# Altium PCB UKU205w.PcbDoc (part 3 of 3)
Units mm, origin at the board's own origin, x right, y up, seen from the top; angles counter-clockwise.
Board outline 374.65 x 264.35 mm, 2 copper layers (Top Layer, Bottom Layer); 276 components, 443 nets, 1000 pads, 796 vias.
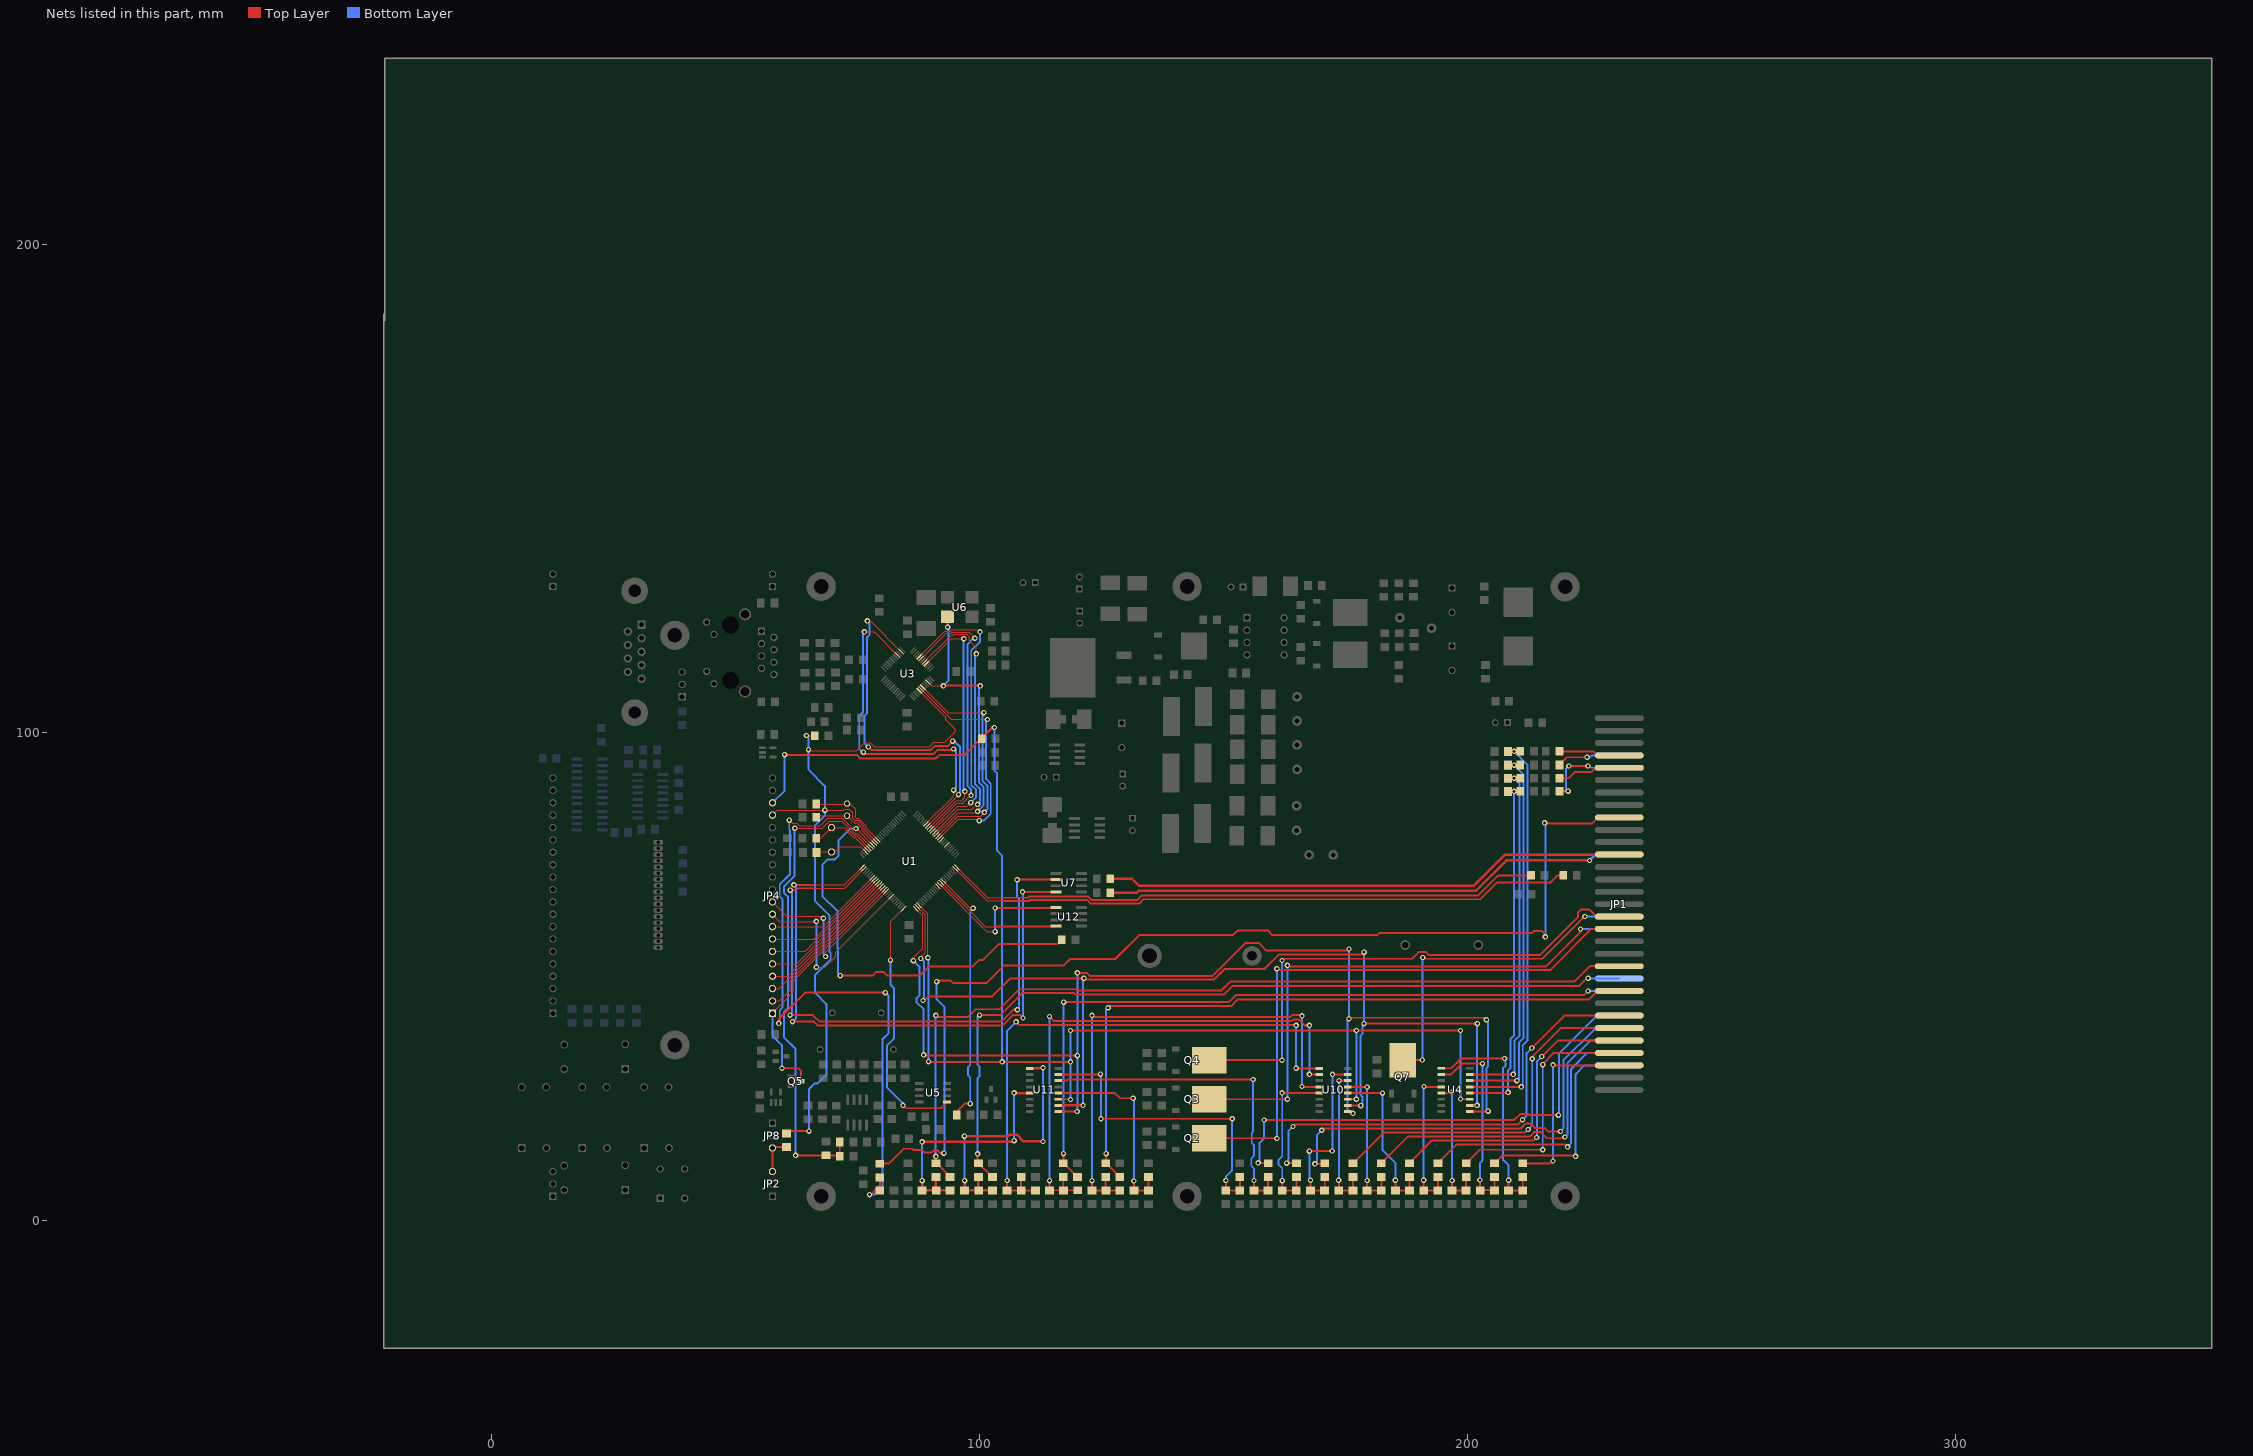
[diagram p3: the nets of this part, all layers, seen from the top]

## Via types
v1: diameter 1.1, hole 0.6, Top Layer to Bottom Layer, 795 vias
v2: diameter 3, hole 2, Top Layer to Bottom Layer, 1 vias

## Nets (pads, with @x,y where several pads share a name; then routed paths per layer and width w, separated by ;. In a path a pad name is that pad's centre, name@x,y a point inside that pad or via, vN(x,y) a via of type N, cw(c..) or ccw(c..) an arc to the next point about the centre after c; other vN are vias at no path point) (continued)
P1_1: U1.94 U3.4 | length 71.5
  Top Layer w0.25: v1(76.35,120.65) 78.366,120.65 U3.4@83.119,115.898 ; U1.94@88.959,81.287 94.65,86.978 v1(94.65,88.2)
  Top Layer w0.4: v1(76.15,96) 76.5,95.65 90.55,95.65 91.3,96.4 94.35,96.4 v1@94.65,96.7
  Bottom Layer w0.4: v1(76.15,96) 75.95,96 75.3,96.65 75.3,103.4 76.05,104.15 76.05,120.35 v1(76.35,120.65) ; v1(94.65,88.2) 95.15,88.7 95.15,96.15 v1(94.65,96.65)
P1_4: U1.93 U3.2 | length 75.5
  Top Layer w0.25: v1(76.95,122.9) 77.531,122.9 U3.2@83.826,116.605 ; U1.93@89.312,80.898 95.65,87.236 v1(95.65,87.3)
  Top Layer w0.4: v1(77.15,97.05) 77.75,96.45 90,96.45 90.85,97.3 93.5,97.3 v1(94.45,98.25)
  Bottom Layer w0.4: v1(76.95,122.9) 77.35,122.5 77.35,120 76.85,119.5 76.85,103.9 76.35,103.4 76.35,97.85 v1(77.15,97.05) ; v1(94.45,98.25) 94.8,98.25 95.95,97.1 95.95,87.6 v1(95.65,87.3)
P1_8: U1.92 U3.40 | length 52.3
  Top Layer w0.25: U3.40@89.023,114.13 94.143,119.25 v1(96.75,119.25) ; U1.92@89.666,80.544 95.172,86.05 96.25,86.05 96.95,86.75 v1(96.95,87.95)
  Bottom Layer w0.4: v1(96.75,119.25) 96.7,119.2 96.7,88.2 v1(96.95,87.95)
P1_9: U1.91 U3.43 | length 58.1
  Top Layer w0.25: U3.43@87.963,115.19 93.122,120.35 94.116,120.35 94.316,120.55 97.8,120.55 v1(99,119.35) ; U1.91@90.019,80.191 95.329,85.5 96.55,85.5 v1(98.2,87.15)
  Bottom Layer w0.4: v1(98.2,87.15) 98.2,88.35 97.5,89.05 97.5,118.15 98.7,119.35 v1(99,119.35)
P1_10: U1.90 U3.44 | length 61.7
  Top Layer w0.25: U3.44@87.609,115.544 92.815,120.75 93.95,120.75 94.3,121.1 99.6,121.1 v1(100.05,120.65) ; U1.90@90.373,79.837 95.436,84.9 97.4,84.9 v1(98.15,85.65)
  Bottom Layer w0.4: v1(98.15,85.65) 99.25,86.75 99.25,88.25 98.25,89.25 98.25,116.85 100.05,118.65 v1(100.05,120.65)
P1_14: U1.89 U3.41 | length 58.6
  Top Layer w0.25: U3.41@88.67,114.483 94.036,119.85 94.35,119.85 94.65,120.15 97.3,120.15 97.85,119.6 97.85,118.85 99.3,117.4 v1(99.3,116.15) ; U1.89@90.727,79.484 95.543,84.3 98.35,84.3 99.35,85.3 v1(99.55,85.3)
  Bottom Layer w0.4: v1(99.3,116.15) 99.05,115.9 99.05,89.4 100.05,88.4 100.05,85.8 v1(99.55,85.3)
P1_15: U1.88 U3.34 U6.3 | length 62.6
  Top Layer w0.25: U3.34@89.377,110.347 90.123,109.6 v1(92.55,109.6) ; U1.88@91.08,79.13 95.55,83.6 99.3,83.6 v1(99.55,83.85)
  Top Layer w0.4: v1@92.581,109.631 v1@100.031,109.631 ; v1(93.4,121.6) U6.3@93.4,123.65
  Bottom Layer w0.4: v1(92.55,109.6) 93.55,110.6 v1@93.55,121.6 ; v1(99.55,83.85) 100.8,85.1 100.8,88.8 99.8,89.8 99.8,109.3 v1(100.1,109.6)
P1_16: U1.87 U3.31 | length 47.5
  Top Layer w0.25: U3.31@88.316,109.286 93.502,104.1 v1(100.85,104.1) ; U1.87@91.434,78.776 95.507,82.85 100.2,82.85 100.95,83.6 v1(100.95,83.65)
  Bottom Layer w0.4: v1(100.85,104.1) 100.55,103.8 100.55,90.15 101.55,89.15 101.55,84.25 v1(100.95,83.65)
P1_17: U1.86 U3.30 | length 48.8
  Top Layer w0.25: U3.30@87.963,108.933 94.195,102.7 v1(101.55,102.7) ; U1.86@91.787,78.423 95.614,82.25 99.6,82.25 v1(99.9,81.95)
  Bottom Layer w0.4: v1(99.9,81.95) 100.85,81.95 102.25,83.35 102.25,89.55 101.3,90.5 101.3,102.45 v1(101.55,102.7)
P1_18: JP4.8 U1.32 | length 24.7
  Top Layer w0.25: JP4.8@57.5,60.23 67.937,60.23 U1.32@77.999,70.291
P1_19: JP4.7 U1.33 | length 25.9
  Top Layer w0.25: JP4.7@57.5,57.69 66.104,57.69 U1.33@78.352,69.938
P1_20: JP4.6 U1.34 | length 27.2
  Top Layer w0.25: JP4.6@57.5,55.15 64.272,55.15 U1.34@78.706,69.584
P1_21: JP4.5 U1.35 | length 28.4
  Top Layer w0.25: JP4.5@57.5,52.61 62.439,52.61 U1.35@79.059,69.231
P1_22: JP4.4 U1.36 | length 29.7
  Top Layer w0.25: JP4.4@57.5,50.07 60.606,50.07 U1.36@79.413,68.877
P1_23: JP4.3 U1.37 | length 31
  Top Layer w0.25: JP4.3@57.5,47.53 58.773,47.53 U1.37@79.766,68.523
P1_24: JP4.2 U1.38 | length 33.3
  Top Layer w0.25: JP4.2@57.5,44.99 58.89,44.99 61.1,47.2 61.1,49.15 U1.38@80.1,68.15
P1_25: JP4.1 Q5.3 U1.39 | length 53.2
  Top Layer w0.25: JP4.1@57.5,42.45 61.8,46.75 61.8,49.143 U1.39@80.473,67.816
  Top Layer w0.4: v1(59.45,31.2) 62.8,31.2 63.395,30.605 Q5.3@63.395,28.544
  Bottom Layer w0.4: JP4.1@57.5,42.45 57.5,37.9 59.45,35.95 v1(59.45,31.2)
P1_26: JP4.10 U1.40 | length 38.4
  Top Layer w0.25: JP4.10@57.5,65.31 60.41,62.4 67.5,62.4 v1(67.95,61.95) ; v1(68.4,54.1) 68.4,55 80.827,67.427 U1.40@80.827,67.463
  Bottom Layer w0.4: v1(67.95,61.95) 67.95,54.55 v1(68.4,54.1)
P1_27: JP4.9 U1.43 | length 41.1
  Top Layer w0.25: JP4.9@57.5,62.77 59.02,61.25 66.55,61.25 v1(66.5,61.3) ; v1(66.5,51.9) 68.25,51.9 70.45,54.1 70.45,54.964 U1.43@81.888,66.402
  Bottom Layer w0.4: v1(66.5,51.9) v1(66.5,61.3)
P1_30: C25.2 R66.2 R67.1 U1.21 | length 99.7
  Top Layer w0.25: v1(62.1,80.4) 67.7,80.4 69.15,81.85 71.743,81.85 73,80.593 73,80.184 74.334,78.85 74.743,78.85 U1.21@77.243,76.35
  Top Layer w0.4: v1(62.25,13.35) 62.3,13.35 62.312,13.362 71.238,13.362 71.3,13.425 R66.2@71.3,16.15
  Bottom Layer w0.4: v1(62.1,80.4) 62.05,80.4 62.05,70.65 59.85,68.45 59.85,67.2 60.65,66.4 60.65,43.5 59.9,42.75 59.9,37.5 62.25,35.15 v1(62.25,13.35)
P1_31: R16.1 R25.1 U1.20 | length 137.1
  Top Layer w0.25: v1(60.95,82.05) 61.55,81.45 62.45,81.45 63,80.9 67.35,80.9 68.85,82.4 71.95,82.4 71.95,82.35 73.073,81.228 73.4,80.9 73.4,80.35 74.5,79.25 75.05,79.25 75.195,79.105 U1.20@77.645,76.655
  Top Layer w0.4: v1(58.8,40.4) 58.8,41.3 64.2,46.7 v1(80.65,46.7) ; v1(77.4,5.3) 77.607,5.3 78.981,6.675 79.507,7.2 R25.1@79.507,8.838
  Bottom Layer w0.4: v1(58.8,40.4) 59,40.6 59,43.1 59.6,43.7 59.6,65.8 59,66.4 59,68.9 61.1,71 61.1,79.9 60.95,80.05 v1(60.95,82.05) ; v1(77.4,5.3) 78.4,5.3 80.1,7 80.1,37.2 81.3,38.4 81.3,46.05 v1(80.65,46.7)
P2_0: R54.1 U1.75 | length 122.8
  Top Layer w0.25: U1.75@95.323,72.413 101.585,66.15 104.6,66.15
  Top Layer w0.4: 104.6,66.15 109.8,66.15 110.05,66.4 122.25,66.4 123,65.65 132.25,65.65 133.25,66.65 202.15,66.65 206.243,70.743 R54.1@212.988,70.743
P2_1: R55.1 U1.74 | length 130.1
  Top Layer w0.25: U1.74@94.969,72.059 101.528,65.5 104.6,65.5
  Top Layer w0.4: 104.6,65.5 110.15,65.5 110.35,65.7 122,65.7 122.75,64.95 132.65,64.95 133.55,65.85 202.6,65.85 206.05,69.3 217.05,69.3 218.493,70.743 R55.1@219.588,70.743
P2_6: R34.1 U1.67 | length 53.2
  Top Layer w0.25: U1.67@92.494,69.584 98.078,64 v1(98.65,64)
  Top Layer w0.4: R34.1@95.288,21.643 95.288,22.288 96.95,23.95 v1(98.05,23.95)
  Bottom Layer w0.4: v1(98.05,23.95) 98.05,29.3 97.6,29.75 97.6,31.45 98.05,31.9 98.05,63.4 v1(98.65,64)
P2_7: U1.66 U12.4 | length 27.1
  Top Layer w0.25: U1.66@92.15,69.25 92.155,69.245 97.95,63.45 101.158,60.242 103.058,60.242
  Top Layer w0.4: 103.05,60.25 103.058,60.242 U12.4@115.539,60.242
P2_8: U1.65 U12.1 | length 32.6
  Top Layer w0.25: U1.65@91.773,68.877 U1.65@91.787,68.877 101.464,59.2 v1(103.15,59.2)
  Top Layer w0.4: v1(103.152,64.052) U12.1@115.539,64.052
  Bottom Layer w0.4: v1(103.15,59.2) 103.15,64.05 v1(103.152,64.052)
P2_9: U1.64
P2_10: JP4.18 R82.2 U1.53 U4.11 U10.11 U11.11 | length 316.5
  Top Layer w0.25: U1.53@87.545,64.634 89.35,62.829 v1(89.35,53.85)
  Top Layer w0.4: v1(60,95.5) 60.05,95.45 74.75,95.45 75.5,94.7 91,94.7 91.75,95.45 96.95,95.45 102.55,101.05 v1(103,101.05) ; v1(89.5,32.55) 89.55,32.5 v1(118.6,32.5) ; U11.11@116.125,24.845 v1@118.555,24.845 ; v1(118.6,38.95) v1(198.55,38.95) ; U10.11@175.425,24.845 177.195,24.845 v1(177.2,24.85) ; v1(198.55,24.9) 198.598,24.852 U4.11@200.42,24.852
  Bottom Layer w0.4: JP4.18@57.5,85.65 JP4.18@57.5,85.63 60,88.13 v1(60,95.5) ; v1(89.35,53.85) 89.5,53.7 v1(89.5,32.55) ; v1(103,101.05) 103,92.2 103.55,91.65 103.55,75.8 104.6,74.75 v1(104.6,32.5) ; v1(118.6,24.8) v1(118.6,38.95) ; v1(177.2,24.85) v1(177.2,38.95) ; v1(198.55,24.9) v1(198.55,38.95)
P2_11: U1.52 U4.10 U10.10 U11.10 | length 223.2
  Top Layer w0.25: U1.52@87.191,64.281 88.8,62.672 88.8,54.9 87.9,54 v1(87.9,53.7)
  Top Layer w0.4: v1@88.4,44.85 89.5,45.95 102.55,45.95 106.2,49.6 121,49.6 121.25,49.35 148,49.35 150.2,51.55 158.35,51.55 161.35,54.55 178.35,54.55 v1(178.8,55) ; U10.10@175.45,23.6 175.5,23.55 v1(178.1,23.55) ; v1(178.75,40.35) v1(202,40.35) ; U4.10@200.42,23.582 201.932,23.582 v1(201.95,23.6)
  Top Layer w0.5: U11.10@116.125,23.575 121.125,23.575 v1(121.15,23.6)
  Bottom Layer w0.4: v1(87.9,53.7) 88.6,53 88.6,45.05 v1@88.4,44.85 ; v1(121.15,23.6) 121.15,49.45 v1(121.35,49.65) ; v1(178.1,23.55) 178.45,23.9 178.45,25.4 178,25.85 178,37.8 178.45,38.25 178.45,40.05 v1(178.75,40.35) ; v1@178.734,40.334 178.734,54.934 v1(178.8,55) ; v1(201.95,23.6) 201.95,40.3 v1(202,40.35)
  other v1: 88.35,45.1
P2_12: U1.51 U4.9 U10.9 U11.9 | length 243.4
  Top Layer w0.25: v1(86.4,53.25) 86.4,53.9 88.3,55.8 88.3,62.465 U1.51@86.837,63.927
  Top Layer w0.4: v1(88.5,33.95) 88.65,33.8 v1(120,33.8) ; U11.9@116.05,22.3 119.9,22.3 v1(119.95,22.35) ; v1(120,50.75) 121.95,50.75 122.6,50.1 147.7,50.1 154.5,56.9 157.15,56.9 158.75,55.3 175.35,55.3 v1(175.7,55.65) ; U10.9@175.425,22.305 176.145,22.305 v1(176.5,21.95) ; v1(175.7,41.35) 175.9,41.55 203.45,41.55 v1(203.85,41.15) ; U4.9@200.42,22.312 204.112,22.312 v1(204.2,22.4)
  Bottom Layer w0.4: v1(86.4,53.25) 87.6,52.05 87.6,46.1 87,45.5 87,44.75 88.5,43.25 v1(88.5,33.95) ; v1(119.95,22.35) 120,22.4 v1(120,50.75) ; v1(175.7,55.65) v1(175.7,41.35) 175.35,41 175.35,22.65 176.05,21.95 v1(176.5,21.95) ; v1(203.85,41.15) 204.2,40.8 204.2,31.6 203.85,31.25 203.85,22.75 v1(204.2,22.4)
P2_13: U1.50 U5.1 | length 53.5
  Top Layer w0.25: v1(81.7,53.35) 81.75,53.4 81.75,61.315 U1.50@84.363,63.927
  Top Layer w0.4: v1(84.25,23.6) 84.85,23 92.006,23 U5.1@93.296,24.29
  Bottom Layer w0.4: v1(81.7,53.35) 81.7,48.35 82.4,47.65 82.4,37.25 80.95,35.8 80.95,27.3 84.25,24 v1(84.25,23.6)
P3_25: U1.27 U7.2 | length 125.9
  Top Layer w0.25: 65.75,68.1 72.272,68.1 U1.27@76.231,72.059
  Top Layer w0.4: v1(61.1,42.1) 65.8,42.1 67.15,40.75 104.4,40.75 106.85,43.2 v1(107.7,43.2) ; v1(61.15,67.7) 62.4,67.7 62.8,68.1 65.75,68.1 ; v1(107.65,69.85) 107.682,69.882 U7.2@115.639,69.882
  Bottom Layer w0.4: v1(61.1,42.1) 61.5,42.5 61.5,67.35 v1(61.15,67.7) ; v1(107.65,69.85) 107.65,66.25 108.05,65.85 108.05,43.55 v1(107.7,43.2)
P3_26: U1.26 U7.4 | length 125.5
  Top Layer w0.25: 65.8,68.8 72.265,68.8 U1.26@75.877,72.413
  Top Layer w0.4: v1(61.6,40.75) 66,40.75 66.75,40 104.7,40 106.85,42.15 108.2,42.15 v1(108.85,41.5) ; v1(61.9,68.8) 65.8,68.8 ; v1(108.75,67.35) 108.758,67.342 U7.4@115.639,67.342
  Bottom Layer w0.4: v1(61.6,40.75) 62.35,41.5 62.35,68.35 v1(61.9,68.8) ; v1(108.75,67.35) 108.85,67.25 v1(108.85,41.5)
P4_28: U1.82
P4_29: U1.85
PROG_RESET: 
PROG_SET: 
PWM1: JP1.23 R40.1 | length 107.5
  Top Layer w0.5: R40.1@126.762,70.057 131.193,70.057 132.6,68.65 201.3,68.65 207.65,75 JP1.23@231,75
PWM2: JP1.24 R41.1 | length 107.6
  Top Layer w0.5: R41.1@126.762,67.157 132.107,67.157 132.55,67.6 201.75,67.6 207.95,73.8 v1(225,73.8)
  Bottom Layer w0.5: v1(225,73.8) 226.225,75.025 JP1.24@231.089,75.025
R1: JP1.35 Q2.4 | length 122.6
  Top Layer w0.4: Q2.4@147.021,16.853 147.024,16.85 160.9,16.85 160.95,16.8 v1(160.9,16.8) ; v1(160.9,51.6) 161.2,51.3 216.9,51.3 225.375,59.775 JP1.35@231.089,59.775
  Bottom Layer w0.4: v1(160.9,16.8) v1(160.9,51.6)
R2: JP1.36 Q3.4 | length 115.1
  Top Layer w0.4: Q3.4@147.021,24.853 155.097,24.853 155.1,24.85 v1(163.05,24.85) ; v1(163.05,52.3) 163.25,52.1 216.1,52.1 223.15,59.15 v1(223.15,59.75)
  Bottom Layer w0.4: v1(163.05,24.85) v1(163.05,52.3) ; v1(223.15,59.75) 223.175,59.775 JP1.36@231.089,59.775
R3: JP1.33 Q4.4 | length 110.3
  Top Layer w0.4: Q4.4@147.021,32.853 154.047,32.853 154.05,32.85 v1(161.95,32.85) ; v1(161.95,53.3) 162.3,53.65 188.6,53.65 189.95,55 191.45,55 192,54.45 214.85,54.45 222.65,62.25 222.65,63.15 223.2,63.7 225,63.7 226.35,62.35 JP1.33@231.05,62.35
  Bottom Layer w0.4: v1(161.95,32.85) v1(161.95,53.3)
R4: JP1.34 Q7.4 | length 69.4
  Top Layer w0.4: Q7.4@186.697,32.871 190.671,32.871 v1(190.7,32.9) ; v1(190.8,53.9) 191.05,53.65 215.3,53.65 223.95,62.3 v1(224.05,62.3)
  Bottom Layer w0.4: v1(190.7,32.9) 190.45,32.9 190.8,33.25 v1(190.8,53.9) ; v1(224.05,62.3) 224.075,62.275 JP1.34@231.089,62.275
RES: D2.1 JP4.17 R81.1 U1.17 U3.29 | length 164.2
  Top Layer w0.25: JP4.17@57.5,83.09 58.46,84.05 61.75,84.05 61.8,84.1 69.05,84.1 69.1,84.05 ; v1(64.9,96.5) 64.9,96.45 65.1,96.25 74.75,96.25 76.45,97.95 77.6,97.95 78.4,97.15 89.7,97.15 90.55,98 92.85,98 95,100.15 95,100.65 93.05,102.6 93.05,103.138 U3.29@87.609,108.579 ; 69.05,84.05 72.1,84.05 72.3,84.25 73.25,84.25 73.95,83.55 73.95,82.472 74.413,82.008 74.942,82.008 76.35,80.6 76.35,80.072 U1.17@78.706,77.716
  Top Layer w0.4: D2.1@60.15,18.3 v1(65,18.3) ; v1@64.943,99.343 R81.1@66.188,99.343
  Bottom Layer w0.4: v1@64.9,99.3 64.9,92.4 68.25,89.05 68.25,83 66.25,81 66.25,65.45 69.2,62.5 69.2,55 69.45,54.75 69.45,53.55 66.25,50.35 66.25,46.65 68.55,44.35 68.55,29.9 66.75,28.1 66.15,28.1 65,26.95 v1(65,18.3)
  other v1: 68.25,84.1 64.45,99.4
RES_BUT: D2.2 JP2.3 JP8.3 | length 7.8
  Top Layer w0.4: JP2.3@57.5,10.03 JP8.3@57.5,14.87 57.675,15.045 D2.2@60.409,15.045
RTCX1: C40.2 U1.16 Y2.1 | length 16.9
  Top Layer w0.25: C40.2@66.55,85.35 72.803,85.35 Y2.1@72.901,85.449 ; Y2.1@72.805,85.449 73.401,85.449 74.538,84.312 74.538,82.591 74.72,82.408 75.107,82.408 76.75,80.766 76.75,80.379 U1.16@79.059,78.069
RTCX2: C41.2 U1.18 Y2.2 | length 14.5
  Top Layer w0.25: C41.2@66.55,82.85 66.649,82.949 Y2.2@72.805,82.949 73.908,81.845 73.908,81.842 74.25,81.5 74.75,81.5 75.867,80.383 75.867,79.886 78.352,77.401 U1.18@78.352,77.362
RX0: 
SK1: JP1.7 R92.1 | length 12.5
  Top Layer w0.4: R92.1@218.809,96.164 225.736,96.164 226.55,95.35 JP1.7@230.95,95.35
SK2: JP1.8 R94.1 | length 13.1
  Top Layer w0.4: R94.1@218.8,93.4 220.35,94.95 225.1,94.95
  Bottom Layer w0.4: 225.1,94.95 225.475,95.325 JP1.8@231.089,95.325
  other v1: 224.5,94.95
SK3: JP1.9 R96.1 | length 13.2
  Top Layer w0.4: R96.1@218.809,90.664 220.714,90.664 221.95,91.9 225.35,91.9 226.25,92.8 JP1.9@231.089,92.8
SK4: JP1.10 R98.1 | length 17.3
  Top Layer w0.4: R98.1@218.8,88 220.05,88 v1@220.1,87.95 ; v1(220.75,93.15) v1@225,93.15
  Bottom Layer w0.4: v1@220.1,87.95 220.05,87.95 220.075,87.975 220.15,88.05 220.15,92.55 v1(220.75,93.15) ; v1@225,93.15 225.35,92.8 JP1.10@231.089,92.8
  other v1: 220.6,88 224.65,93.15
T1: JP1.45 R8.2 R17.1 | length 142.2
  Top Layer w0.4: v1@125.9,13.35 125.9,11.7 R17.1@128.65,8.95 ; v1(126.3,43.6) 126.65,43.95 151.55,43.95 152.9,45.3 224.9,45.3 226.65,47.05 JP1.45@231.089,47.05
  Bottom Layer w0.4: v1@125.9,13.35 125.9,43.2 v1(126.3,43.6)
  other v1: 125.9,13.7
T2: JP1.46 R9.2 R18.1 | length 152.1
  Top Layer w0.4: v1@117.15,13.5 117.15,11.6 117.3,11.6 R18.1@120.05,8.85 ; v1(117.2,44.75) 117.25,44.8 151.1,44.8 152.5,46.2 223.85,46.2 v1(224.7,47.05)
  Bottom Layer w0.4: v1@117.15,13.5 117.15,44.7 v1(117.2,44.75) ; v1(224.7,47.05) JP1.46@231.089,47.05
  other v1: 117.15,13.7
T3: JP1.43 R11.2 R19.1 | length 161.4
  Top Layer w0.4: R11.2@108.45,11.75 108.55,11.75 R19.1@111.4,8.9 ; R11.2@108.514,11.741 108.514,13.414 v1@108.55,13.45 ; v1(110,45.4) 110.4,45.8 119.1,45.8 119.35,45.55 150.65,45.55 152.2,47.1 223.05,47.1 224.2,48.25 225.3,48.25 226.65,49.6 JP1.43@231.089,49.6
  Bottom Layer w0.4: v1@108.55,13.45 108.55,38.7 110,40.15 v1(110,45.4)
  other v1: 108.55,13.65
T3: 
T3: 
T3: 
T4: JP1.44 R115.1 R119.2 | length 169.6
  Top Layer w0.4: v1@99.55,13.35 99.55,11.85 99.65,11.75 99.687,11.713 R119.2@99.75,11.65 ; R119.2@99.714,11.741 102.514,8.941 R115.1@102.614,8.941 ; v1(99.95,42.1) 104.2,42.1 108.7,46.6 119.35,46.6 119.65,46.3 150.05,46.3 151.85,48.1 222.9,48.1 224.45,49.65 v1(224.7,49.65)
  Bottom Layer w0.4: v1@99.55,13.35 99.55,29.2 99.9,29.55 99.9,31.6 99.55,31.95 99.55,41.7 v1(99.95,42.1) ; v1(224.7,49.65) 224.75,49.6 JP1.44@231.089,49.6
  other v1: 99.55,13.65
T5: JP1.41 R116.1 R120.2 | length 179.3
  Top Layer w0.4: v1@90.9,13.4 90.95,13.35 90.95,11.7 91.156,11.7 R116.1@93.914,8.941 ; v1(91,42.05) 91.35,41.7 97.55,41.7 99.15,43.3 104,43.3 108.1,47.4 119.75,47.4 120,47.15 149.55,47.15 151.35,48.95 221.85,48.95 225.025,52.125 JP1.41@231.089,52.125
  Bottom Layer w0.4: v1@90.9,13.4 90.9,41.95 v1(91,42.05)
  other v1: 91,13.15
TD1: 
TX0: 
TX0: 
TX0: 
TX0: 
TX0: 
TX0: 
TX0: 
TX0: 
TX0: 
TX0: 
TX0: 
TX0: 
TX0: 
TX0: 
TX0: 
TX0: 
TX0: 
TX0: 
TX0: 
TX0: 
TX0: 
TX0: 
TX0: 
TX0: 
TX0: 
TX0: 
TX0: 
TX0: 
TX0: 
TX0: 
TX0: 
TX0: 
TX0: 
TX0: 
TX0: 
TX0: 
TX0: 
TX0: 
TX0: 
TX0: 
TX0: 
TX0: 
TX0: 
TX0: 
TX0: 
TX0: 
TX0: 
TX0: 
TX0: 
TX0: 
TX0: 
TX0: 
TX0: 
TX0: 
TX0: 
TX0: 
TX0: 
TX0: 
TX0: 
TX0: 
TX0: 
TX0: 
TX0: 
TX0: 
TX0: 
TX0: 
TX0: 
TX0: 
TX0: 
TX0: 
TX0: 
TX0: 
TX0: 
TX0: 
TX0: 
TX0: 
TX0: 
TX0: 
TX0: 
TX0: 
TX0: 
TX0: 
TX0: 
TX0: 
TX0: 
TX0: 
TX0: 
TX0: 
TX0: 
TX0: 
TX0: 
U1: JP1.57 R20.2 | length 39.8
  Top Layer w0.4: R20.2@211.25,11.65 216.95,11.65 v1(217.5,12.2) ; v1(217.5,31.9) 217.6,31.8 JP1.57@231.089,31.8
  Bottom Layer w0.4: v1(217.5,12.2) v1(217.5,31.9)
U2: 
U2: 
U2: 
U2: 
U2: 
U2: 
U2: 
U2: 
U2: 
U2: JP1.58 R21.2 | length 43.9
  Top Layer w0.4: R21.2@205.507,11.738 207.069,13.3 222,13.3 v1(222.15,13.15)
  Bottom Layer w0.4: v1(222.15,13.15) 222.15,30 223.95,31.8 JP1.58@231.089,31.8
U3: JP1.55 R22.2 | length 51
  Top Layer w0.4: R22.2@199.707,11.738 202.469,14.5 v1(215.4,14.5) ; v1(215.4,31.95) 215.4,32.05 217.7,34.35 JP1.55@231.089,34.35
  Bottom Layer w0.4: v1(215.4,14.5) v1(215.4,31.95)
U4: JP1.56 R83.2 | length 55.9
  Top Layer w0.4: R83.2@193.9,11.75 197.7,15.55 220.05,15.55 v1(220.5,15.1)
  Bottom Layer w0.4: v1(220.5,15.1) 221.2,15.8 221.2,31.05 224.5,34.35 JP1.56@231.089,34.35
U5: JP1.53 R84.2 | length 62.5
  Top Layer w0.4: R84.2@188.1,11.8 192.7,16.4 213.55,16.4 v1(214.15,17) ; v1(215.2,33.6) 218.475,36.875 JP1.53@231.089,36.875
  Bottom Layer w0.4: v1(214.15,17) 214.25,17.1 214.25,32.65 v1(215.2,33.6)
U6: JP1.54 R85.2 | length 68.8
  Top Layer w0.4: R85.2@182.314,11.741 187.773,17.2 212.75,17.2 213.65,18.1 214.95,18.1 216.2,16.85 219.7,16.85 v1(219.95,17.1)
  Bottom Layer w0.4: v1(219.95,17.1) 220.45,17.6 220.45,32.2 225.125,36.875 JP1.54@231.089,36.875
U7: JP1.51 R86.2 | length 74.3
  Top Layer w0.4: R86.2@176.514,11.741 182.773,18 211.75,18 v1(212.4,18.65) ; v1(213.25,33.15) 213.25,33.6 219.075,39.425 JP1.51@231.089,39.425
  Bottom Layer w0.4: v1(212.4,18.65) 213.25,19.5 v1(213.25,33.15)
U8: JP1.52 R87.2 | length 88.1
  Top Layer w0.4: v1@169.15,11.6 170.573,11.6 R87.2@170.714,11.741 ; v1(170.1,18.5) 170.1,18.6 170.35,18.85 210.9,18.85 211.95,19.9 212.85,19.9 213.75,19 215.7,19 216.45,18.25 v1(219,18.25)
  Bottom Layer w0.4: v1@169.15,11.6 169.15,17.55 v1(170.1,18.5) ; v1(219,18.25) 219.65,18.9 219.65,32.8 226.275,39.425 JP1.52@231.089,39.425
  other v1: 168.7,11.6
U9: JP1.49 R88.2 | length 93.4
  Top Layer w0.4: v1@163.25,11.75 163.259,11.741 R88.2@164.914,11.741 ; v1(164.2,19.25) 164.6,19.65 210.25,19.65 v1(211.25,20.65) ; v1(213.15,35.35) 219.8,42 JP1.49@231.089,42
  Bottom Layer w0.4: v1@163.25,11.75 163.25,18.3 v1(164.2,19.25) ; v1(211.25,20.65) 212.1,21.5 212.1,34.3 v1(213.15,35.35)
  other v1: 162.9,11.75
U10: JP1.50 R91.2 | length 100.3
  Top Layer w0.4: v1@157.35,11.8 157.409,11.741 R91.2@159.114,11.741 ; v1(158.3,20.6) 209.6,20.6 210.85,21.85 212.4,21.85 212.65,21.6 v1(218.6,21.6) ; R91.2@159.05,11.65 R91.2@159.128,11.728
  Bottom Layer w0.4: v1@157.35,11.8 157.35,15.9 158.3,16.85 v1(158.3,20.6) ; v1(218.6,21.6) 218.7,21.7 218.7,34.2 226.5,42 JP1.50@231.089,42
  other v1: 157.05,11.8
UAKB: 
UAKB: 
UAKB: 
UAKB: 
UAKB: 
UAKB: 
UAKB: 
UAKB: 
UAKB: 
UAKB: 
UAKB: 
UAKB: 
UAKB: 
UAKB: 
UAKB: 
UAKB: 
UAKB: 
UAKB: 
UAKB: 
UAKB: 
UAKB: 
UAKB: 
UAKB: 
UAKB: 
UAKB: 
UAKB: 
UAKB: 
UAKB: 
UI1: C4.1 R6.1 R23.2 U11.15 | length 65.7
  Top Layer w0.4: U11.15@116.125,29.925 124.675,29.925 v1(124.75,30) ; v1(124.85,20.85) v1(151.75,20.85) ; v1@150.45,8 150.45,6.15 150.432,6.15 150.419,6.138 R23.2@153.307,6.138 R6.1@153.307,8.938
  Bottom Layer w0.4: v1(124.75,30) 124.85,29.9 v1(124.85,20.85) ; v1@150.45,8 150.45,8.95 151.75,10.25 v1(151.75,20.85)
  other v1: 150.45,8.2
UI2: C5.1 R7.1 R24.2 U11.12 | length 40.5
  Top Layer w0.4: U11.12@116.125,26.115 127.685,26.115 128.75,25.05 v1(131.45,25.05) ; v1@131.6,7.95 131.602,7.948 C5.1@131.602,6.155 131.619,6.138 R24.2@134.607,6.138 R7.1@134.607,8.938
  Bottom Layer w0.4: v1(131.45,25.05) 131.6,24.9 v1@131.6,7.95
  other v1: 131.6,8.1
US: JP1.17 R25.2 | length 221.3
  Top Layer w0.4: R25.2@79.507,11.638 81.338,11.638 84.4,14.7 86.2,14.7 86.5,14.4 88.25,14.4 88.75,13.9 90.15,13.9 90.6,14.35 91.35,14.35 91.9,13.8 v1(92.65,13.8) ; v1(91.15,48.95) 91.35,49.15 94.05,49.15 94.5,48.7 101.45,48.7 105.05,52.3 117.25,52.3 118.55,53.6 127.75,53.6 132.65,58.5 151.9,58.5 152.8,59.4 159.1,59.4 160,58.5 181.5,58.5 181.95,58.95 213.25,58.95 213.65,59.35 215.2,59.35 215.95,58.6 v1(215.95,58.15) ; v1(215.8,81.5) 215.95,81.35 225.45,81.35 226.725,82.625 JP1.17@231.089,82.625
  Bottom Layer w0.4: v1(91.15,48.95) 91.15,45.35 92.8,43.7 92.8,13.95 v1(92.65,13.8) ; v1(215.8,81.5) 215.95,81.35 v1(215.95,58.15)
US1: 
US1: 
US1: 
US1: 
US1: 
US1: 
US1: 
US1: 
US1: 
US1: 
US1: 
US1: 
US1: 
US1: 
US1: 
US1: 
US1: 
US1: 
US1: 
US1: 
US1: 
US1: 
US1: 
US1: 
US1: 
US1: 
US1: 
US1: 
US1: 
US1: 
US1: 
US1: 
USK1: C50.1 R93.2 R111.2 U4.13 | length 84.7
  Top Layer w0.4: U4.13@200.42,27.392 210.992,27.392 v1(211,27.4) ; R111.2@208.35,96.15 208.364,96.164 R93.2@210.809,96.164
  Bottom Layer w0.4: C50.1@208.291,96.136 209.536,96.136 v1(209.55,96.15) 212.25,93.45 212.25,36.85 211.3,35.9 211.3,27.7 v1(211,27.4)
USK2: C51.1 R95.2 R112.2 U4.14 | length 79.5
  Top Layer w0.4: U4.14@200.42,28.662 200.432,28.65 v1(210.1,28.65) ; R112.2@208.291,93.336 208.32,93.364 R95.2@210.809,93.364
  Bottom Layer w0.4: C51.1@208.291,93.336 209.536,93.336 v1(209.55,93.35) 211.45,91.45 211.45,37.4 210.55,36.5 210.55,29.1 v1(210.1,28.65)
USK3: C52.1 R97.2 R113.2 U4.15 | length 74.4
  Top Layer w0.4: U4.15@200.42,29.932 200.438,29.95 v1(209.35,29.95) ; R113.2@208.291,90.636 208.32,90.664 R97.2@210.809,90.664
  Bottom Layer w0.4: C52.1@208.291,90.636 209.536,90.636 v1(209.55,90.65) 210.65,89.55 210.65,37.9 209.65,36.9 209.65,30.3 209.35,30 v1(209.35,29.95)
USK4: C53.1 R99.2 R114.2 U4.12 | length 73.9
  Top Layer w0.4: U4.12@200.422,26.122 208.172,26.122 v1(208.3,26.25) ; R114.2@208.291,87.936 208.32,87.964 R99.2@210.809,87.964
  Bottom Layer w0.4: C53.1@208.291,87.936 v1@209.536,87.936 ; v1(208.3,26.25) 208.3,30.75 208.75,31.2 208.75,37.2 209.536,37.986 v1@209.536,87.936 ; v1(209.55,87.95) v1@209.536,87.936
UT1: C6.1 D3.2 R8.1 R26.2 U10.4 | length 105.9
  Top Layer w0.4: C6.1@122.994,6.155 122.994,7.944 v1@123,7.95 ; v1(123,42.05) 123.35,41.7 163.6,41.7 164,42.1 165.9,42.1 v1(166.05,41.95) ; C6.1@123.05,6.15 123.059,6.141 R26.2@128.714,6.141 ; R8.1@125.814,8.941 125.814,6.177 D3.2@125.85,6.141 ; v1(166.05,27.45) 166.115,27.385 U10.4@169.575,27.385
  Bottom Layer w0.4: v1@123,7.95 v1(123,42.05) ; v1(166.05,27.45) v1(166.05,41.95)
  other v1: 123,8.15
UT2: C7.1 D4.2 R9.1 R27.2 U10.2 | length 110.5
  Top Layer w0.4: C7.1@114.25,6.2 114.259,6.191 R27.2@120.064,6.191 ; C7.1@114.294,6.155 114.294,7.694 114.3,7.7 v1@114.3,7.8 ; v1(114.3,41.8) 115.2,40.9 163.95,40.9 164.25,41.2 165.4,41.2 166.6,40 v1(167.55,40) ; D4.2@117.1,6.25 117.114,6.264 R9.1@117.114,8.941 ; v1(167.55,29.95) 167.575,29.925 U10.2@169.575,29.925
  Bottom Layer w0.4: v1@114.3,7.8 v1(114.3,41.8) ; v1(167.55,29.95) v1(167.55,40)
  other v1: 114.3,8.15
UT3: C8.1 D5.2 R11.1 R28.2 U10.1 | length 115.2
  Top Layer w0.4: v1@105.6,8.05 105.6,6.173 105.6,6.15 R28.2@111.3,6.15 ; v1(107.45,40.7) 108.05,40.1 164.8,40.1 v1@164.85,40.15 ; D5.2@108.483,6.147 108.483,8.91 R11.1@108.514,8.941 ; v1(164.85,31.2) 164.855,31.195 U10.1@169.575,31.195
  Bottom Layer w0.4: v1@105.6,8.05 105.6,38.85 v1(107.45,40.7) ; v1(164.85,31.2) v1@164.85,40.15
  other v1: 105.6,8.2 164.85,40
UT4: C54.1 D1.2 R117.2 R119.1 U11.1 | length 54.3
  Top Layer w0.5: v1(96.85,17.3) 105.8,17.3 106.1,17.6 107.6,17.6 109,16.2 v1(112.95,16.2) ; C54.1@96.886,6.159 102.609,6.159 R117.2@102.65,6.2 ; C54.1@96.9,6.159 v1@96.9,8 ; R119.1@99.714,8.941 99.714,6.236 D1.2@99.75,6.2 ; U11.1@110.275,31.195 112.845,31.195 v1(112.95,31.3)
  Bottom Layer w0.4: v1(96.85,17.3) 96.9,17.25 v1@96.9,8 ; v1(112.95,16.2) v1(112.95,31.3)
  other v1: 96.9,8.15
UT5: C55.1 D8.2 R118.2 R120.1 U11.5 | length 50.6
  Top Layer w0.5: v1(88.2,8.15) 88.2,8.1 88.186,8.086 C55.1@88.186,6.159 94.041,6.159 R118.2@94.05,6.15 ; v1(88.2,16.1) 106.8,16.1 v1(107.05,16.35) ; R120.1@91.014,8.941 91.014,6.216 D8.2@91.083,6.147 ; v1(107.05,26.15) 107.085,26.115 U11.5@110.275,26.115
  Bottom Layer w0.4: v1(88.2,8.15) v1(88.2,16.1) ; v1(107.05,16.35) v1(107.05,26.15)
UU1: C1.1 R12.1 R20.1 U4.1 | length 47.4
  Top Layer w0.4: U4.1@194.57,31.202 196.652,31.202 198.65,33.2 v1(207.6,33.2) ; v1@208.4,8 208.4,6.157 C1.1@208.402,6.155 208.407,6.15 211.35,6.15 211.307,6.193 R20.1@211.307,8.938
  Bottom Layer w0.4: v1(207.6,33.2) 207.8,33 207.8,31.75 207.25,31.2 207.25,12.5 208.4,11.35 v1@208.4,8
  other v1: 208.4,8.25
UU2: C2.1 R13.1 R21.1 U4.2 | length 41.4
  Top Layer w0.4: U4.2@194.57,29.932 196.632,29.932 198.85,32.15 v1(203.05,32.15) ; v1@202.5,7.95 202.5,6.15 202.55,6.2 205.5,6.2 205.507,6.207 R21.1@205.507,8.938
  Bottom Layer w0.4: v1@202.5,7.95 202.5,11.7 203.05,12.25 v1(203.05,32.15)
  other v1: 202.5,8.3
UU3: C3.1 R15.1 R22.1 U4.5 | length 28.2
  Top Layer w0.4: U4.5@194.57,26.122 196.672,26.122 v1(196.8,26.25) ; v1@196.85,7.95 196.823,7.923 196.823,6.176 199.707,6.176 R22.1@199.707,8.938
  Bottom Layer w0.4: v1(196.8,26.25) 196.823,26.227 v1@196.823,7.923 ; v1@196.85,7.95 v1@196.95,8.05
  other v1: 196.823,8.2
UU4: C43.1 R10.1 R83.1 U4.4 | length 30.6
  Top Layer w0.4: v1@191,8 191,6.1 191.059,6.159 R10.1@193.886,6.159 193.914,6.188 R83.1@193.914,8.941 ; v1(191.05,27.45) 191.108,27.392 U4.4@194.57,27.392
  Bottom Layer w0.4: v1@191,8 191,27.4 v1(191.05,27.45)
  other v1: 191,8.25
UU5: C44.1 R14.1 R84.1 U10.12 | length 33.9
  Top Layer w0.4: U10.12@175.46,26.15 U10.12@175.425,26.115 175.44,26.1 v1(182.55,26.1) ; v1@185.2,8 C44.1@185.2,6.15 188.077,6.15 188.114,6.188 R84.1@188.114,8.941
  Bottom Layer w0.4: v1(182.55,26.1) 182.55,14.45 185.2,11.8 v1@185.2,8
  other v1: 185.2,8.25
UU6: C45.1 R74.1 R85.1 U10.13 | length 30.9
  Top Layer w0.4: U10.13@175.425,27.385 179.365,27.385 v1(179.4,27.35) ; v1@179.4,8 C45.1@179.4,6.15 182.3,6.15 182.314,6.164 R85.1@182.314,8.941
  Bottom Layer w0.4: v1@179.4,8 v1(179.4,27.35)
  other v1: 179.4,8.2
UU7: C46.1 R75.1 R86.1 U10.14 | length 30
  Top Layer w0.4: v1@173.6,8 C46.1@173.6,6.15 176.477,6.15 R75.1@176.486,6.159 176.514,6.188 R86.1@176.514,8.941 ; v1(173.65,28.65) 173.655,28.655 U10.14@175.425,28.655
  Bottom Layer w0.4: v1@173.6,8 173.6,28.6 v1(173.65,28.65)
  other v1: 173.55,8.25
UU8: C47.1 R76.1 R87.1 U10.15 | length 37.5
  Top Layer w0.4: v1(167.55,14.2) 167.5,14.2 167.55,14.25 v1(172.25,14.25) ; v1@167.8,8 C47.1@167.8,6.15 167.838,6.188 170.714,6.188 R87.1@170.714,8.941 ; v1(172.3,29.95) U10.15@175.4,29.95
  Bottom Layer w0.4: v1(167.55,14.2) 167.55,8.25 v1@167.8,8 ; v1(172.25,14.25) 172.3,14.3 v1(172.3,29.95)
  other v1: 167.8,8.25
UU9: C48.1 R77.1 R88.1 U10.5 | length 34
  Top Layer w0.4: v1(161.95,26.15) 161.985,26.115 U10.5@169.575,26.115 ; v1@162,7.95 C48.1@162,6.15 162.009,6.159 R77.1@164.886,6.159 ; R88.1@164.914,8.941 164.914,6.186 R77.1@164.95,6.15
  Bottom Layer w0.4: v1(161.95,26.15) 162,26.1 162,13.15 161.25,12.4 161.25,11.45 162,10.7 v1@162,7.95
  other v1: 162,8.15
UU10: C49.1 R78.1 R91.1 U11.14 | length 69.2
  Top Layer w0.4: U11.14@116.125,28.655 117.855,28.655 118.1,28.9 v1(156.05,28.9) ; v1@156.2,7.9 C49.1@156.2,6.15 156.238,6.188 159.114,6.188 R91.1@159.114,8.941
  Bottom Layer w0.4: v1(156.05,28.9) 156.05,18.15 155.75,17.85 155.75,15.9 156.2,15.45 156.2,13.25 155.65,12.7 155.65,11.25 156.2,10.7 v1@156.2,7.9
  other v1: 156.2,8.2
VBAT: D6.2 U1.19 | length 89.9
  Top Layer w0.25: v1(74.65,80.357) U1.19@77.999,77.009
  Top Layer w0.4: v1(71.4,50.2) 78.05,50.2 78.8,50.95 80.25,50.95 80.95,50.25 87.75,50.25 89.6,52.1 98.55,52.1 99.8,53.35 100.6,53.35 103.95,56.7 115.954,56.7 D6.2@116.795,57.541
  Bottom Layer w0.4: v1(71.4,50.2) 70.9,50.7 70.9,55.7 70.8,55.8 70.8,63.45 67.75,66.5 67.75,72.9 68.85,74 70.3,74 71.05,74.75 71.05,77.9 73.507,80.357 v1(74.65,80.357) 74.65,80.4 v1@74.607,80.357
VS: JP1.18 R71.2 | length 211.7
  Top Layer w0.4: R71.2@85.307,11.738 v1@85.307,13.143 ; v1(86.15,46.85) 90.75,46.85 92.15,48.25 93.7,48.25 94.2,47.75 101.8,47.75 105.4,51.35 117.55,51.35 118.85,52.65 128.05,52.65 133,57.6 152.3,57.6 153.3,58.6 158.7,58.6 159.65,57.65 182,57.65 182.5,58.15 214.5,58.15 v1(214.55,58.2) ; v1(214.65,82.6) 214.75,82.5 v1@224.95,82.5
  Bottom Layer w0.4: v1@85.307,13.143 86.9,14.737 86.9,43.45 86.15,44.2 v1(86.15,46.85) ; v1(214.55,58.2) 214.55,82.25 214.775,82.475 214.9,82.6 v1(214.65,82.6) ; v1@224.95,82.5 225.075,82.625 JP1.18@231.089,82.625
  other v1: 85.3,13.45 224.8,82.5
VS: 
VS: 
VS: 
VS: 
VS: 
VS: 
VS: 
VS: 
VS: 
VS: 
VS: 
VS: 
VS: 
VS: 
VS: 
VS: 
VS: 
VS: 
VS: 
VS: 
VS: 
VS: 
VS: 
VS: 
VS: 
VS: 
VS: 
VS: 
VS: 
VS: 
XTAL1: C21.2 U1.22 Y1.1 | length 13.4
  Top Layer w0.25: C21.2@66.488,78.343 67.401,78.343 Y1.1@69.6,80.542 72.344,80.542 72.6,80.286 72.6,80.019 74.169,78.45 74.436,78.45 U1.22@76.938,75.948
XTAL2: C31.2 U1.23 Y1.2 | length 11
  Top Layer w0.25: C31.2@66.537,75.444 66.635,75.542 70.342,75.542 71.45,76.65 75.529,76.65 U1.23@76.584,75.595
pads on no net: J2.1 J2.6 J2.8 J2.9 J2.10 J2.11 J301.0 J301.7 JP1.3 JP1.4 JP1.15 JP1.30 JP1.31 JP1.32 JP1.42 U1.1 U1.2 U1.3 U1.4 U1.5 U1.14 U1.24 U1.44 U1.45 U1.48 U1.49 U1.63 U1.68 U1.69 U1.70 U1.73 U1.81 U1.100 U2.18 U3.1 U3.5 U3.6 U3.8 U3.9 U3.10 U3.11 U3.12 U3.25 U3.33 U3.38 U3.42 U3.45 U3.46 U6.1 U7.1 U7.8 U8.3 U8.4 U8.5 U8.6 U9.1 U9.5 U9.8 U11.2 U11.4 U11.13 U12.5 U13.3 U14.11 U14.12 U14.13 U14.14 U15.3 U15.4 U15.5 U15.6 U19.4 U102.4 U102.8
copper on no net: | length 0.4
  Bottom Layer w0.5: -84.35,-36.55 -83.9,-36.55

## Polygon pours and split planes (outlines as drawn)
+3V3 on Top Layer (hatched 90Degree grid 0.1 track 0.3, remove dead copper): 62,117.15 62,111.25 74.75,111.25 74.75,117.85 61.95,117.85 61.95,116.6 62.05,116.6
NetC103_2 on Top Layer (hatched 90Degree grid 0.1 track 0.3, remove dead copper): 191.05,131.75 191.05,114.6 199.95,114.6 199.95,112.3 205.25,112.3 205.25,131.65 191,131.65
GND on Top Layer (hatched 90Degree grid 0.1 track 0.3, remove dead copper): -69.43,107.9 -36.213,76 -48.75,63.464 -61.686,76.4 -60.736,76.4 -48.936,88.2 -48.413,88.2
NetJP3_1 on Top Layer (hatched 90Degree grid 0.1 track 0.3, remove dead copper): -1.3,77.85 43.7,77.85 43.7,-1.2 -4.35,-1.2 -4.35,77.85 -0.75,77.85 -0.75,77.8
NetC28_2 on Top Layer (hatched 90Degree grid 0.1 track 0.3, remove dead copper): -1.9,136.75 -1.9,103.25 20.55,103.25 20.55,79.3 43.85,79.3 43.85,137.5 -1.95,137.5 -1.95,136.3 -2,136.3
GND on Top Layer (hatched 90Degree grid 0.1 track 0.3, remove dead copper): 61.5,116.15 62.543,116.15 61.55,127.07 61.55,110.8 75.2,110.8 75.2,118.3 61.5,118.3
GND on Top Layer (hatched 90Degree grid 0.1 track 0.3, remove dead copper): 239.25,93.85 209.4,93.85 209.4,108.65 170,108.65 170,72.3 134.5,72.3 134.5,109.8 150,109.8 150,137.7 47.45,137.7 47.45,-2.6 242.45,-2.6 242.45,93.9 238.95,93.9
GND on Bottom Layer (hatched 90Degree grid 0.1 track 0.3, remove dead copper): 242.6,91.2 209.25,91.2 209.25,108.7 170.05,108.7 170.05,72.3 134.5,72.3 134.5,110.1 150,110.1 150,137.3 47.5,137.3 47.5,-2.6 239.85,-2.6 239.85,91.15
GND on Bottom Layer (hatched 90Degree grid 0.1 track 0.3, remove dead copper): 77.814,112 84.85,104.964 92.186,112.3 85.536,118.95 85.378,118.95 85.173,119.36
GND on Bottom Layer (hatched 90Degree grid 0.1 track 0.3, remove dead copper): 73.714,73.8 85.5,62.014 97.236,73.75 85.97,85.017 85.623,85.71
+3V3 on Bottom Layer (hatched 90Degree grid 0.1 track 0.3, remove dead copper): 85.05,118.6 78.45,112 84.85,105.6 91.55,112.3 85.35,118.5 85.1,118.5
NetC103_2 on Bottom Layer (hatched 90Degree grid 0.1 track 0.3, remove dead copper): 191.05,131.7 191.05,114.65 199.95,114.65 199.95,112.3 205.25,112.3 205.25,131.7
+3V3 on Bottom Layer (hatched 90Degree grid 0.1 track 0.3, remove dead copper): 85.5,84.95 74.35,73.8 85.5,62.65 96.5,73.65 96.6,73.75 85.6,84.75

## Keep-outs
Keep-Out Layer:
  lines w0.3: 5,106.8 22.1,106.8 22.1,116.85 ; 5,126.8 22.1,126.8 22.1,116.8
  lines w0.5: 5,106.75 5,126.7 4.95,126.75 22,126.75 22.1,126.65 22.1,106.8 ; 5,106.8 22.1,106.8 ; 42,107.95 42,-0.05 0,-0.05 0,134.95 42,134.95 42,124.6 ; 42,108 48.4,108 ; 42,124.7 48.5,124.7 ; 44.5,108.1 44.5,108.25 ; 48.5,124.6 52.5,128.6 52.5,134.95 224.9,134.95 ; 48.55,108.05 52.5,104.15 52.5,-0.05 ; 52.5,0 52.6,-0.1 225,-0.1 225,24.75 ; 225,24.85 237.45,24.85 ; 225,134.95 225,105 225.05,104.95 237.45,104.95 237.5,105 ; 237.5,24.95 237.5,104.95 ; 22.1,106.8 22.1,106.8

## Silkscreen, mask and mechanical layers (free items; w line width, h text height)
Top Solder:
  rectangle: 107.65,105.35 124.9,121.45
Mechanical 1:
  drawing of 198 lines, arcs and shapes, not listed
Mechanical 3:
  lines w0.25: -53.94,-2.01 -52.25,-2.01 -52.25,-3.62
  lines w0.3: 88.9,92.8 88.9,99.55 117.2,99.55 117.2,92.8 ; 91.4,92.8 91.4,99.55 ; 101.9,-1.65 101.9,45.65 ; 114.7,92.8 114.7,99.55

## Text inside footprints (layer, text, board x,y; h text height)
Q2: Top Overlay "1" at 141.346,19.393 h1 r270; Top Overlay "3" at 141.346,15.065 h1 r270
Q3: Top Overlay "1" at 141.346,27.393 h1 r270; Top Overlay "3" at 141.346,23.065 h1 r270
Q4: Top Overlay "1" at 141.346,35.393 h1 r270; Top Overlay "3" at 141.346,31.065 h1 r270
Q7: Top Overlay "1" at 184.157,27.196 h1; Top Overlay "3" at 188.485,27.196 h1
Q100: Top Overlay "1" at 170.244,127.19 h1 r270; Top Overlay "3" at 170.244,122.862 h1 r270
Q101: Top Overlay "1" at 170.244,118.49 h1 r270; Top Overlay "3" at 170.244,114.162 h1 r270
U101: Top Overlay "1" at 127.878,110.542 h1 r90; Top Overlay "3" at 127.878,115.364 h1 r90
U104: Top Overlay "3" at 137.682,116 h1 r270; Top Overlay "1" at 137.682,120.243 h1 r270